# Altium PCB ServoBot.PcbDoc
Units mm, origin at the board's own origin, x right, y up, seen from the top; angles counter-clockwise.
Board outline 80.8 x 30 mm, 2 copper layers (Top Signal Layer, Bottom Signal Layer), stack 1.571 mm thick; 31 components, 24 nets, 110 pads, 26 vias.
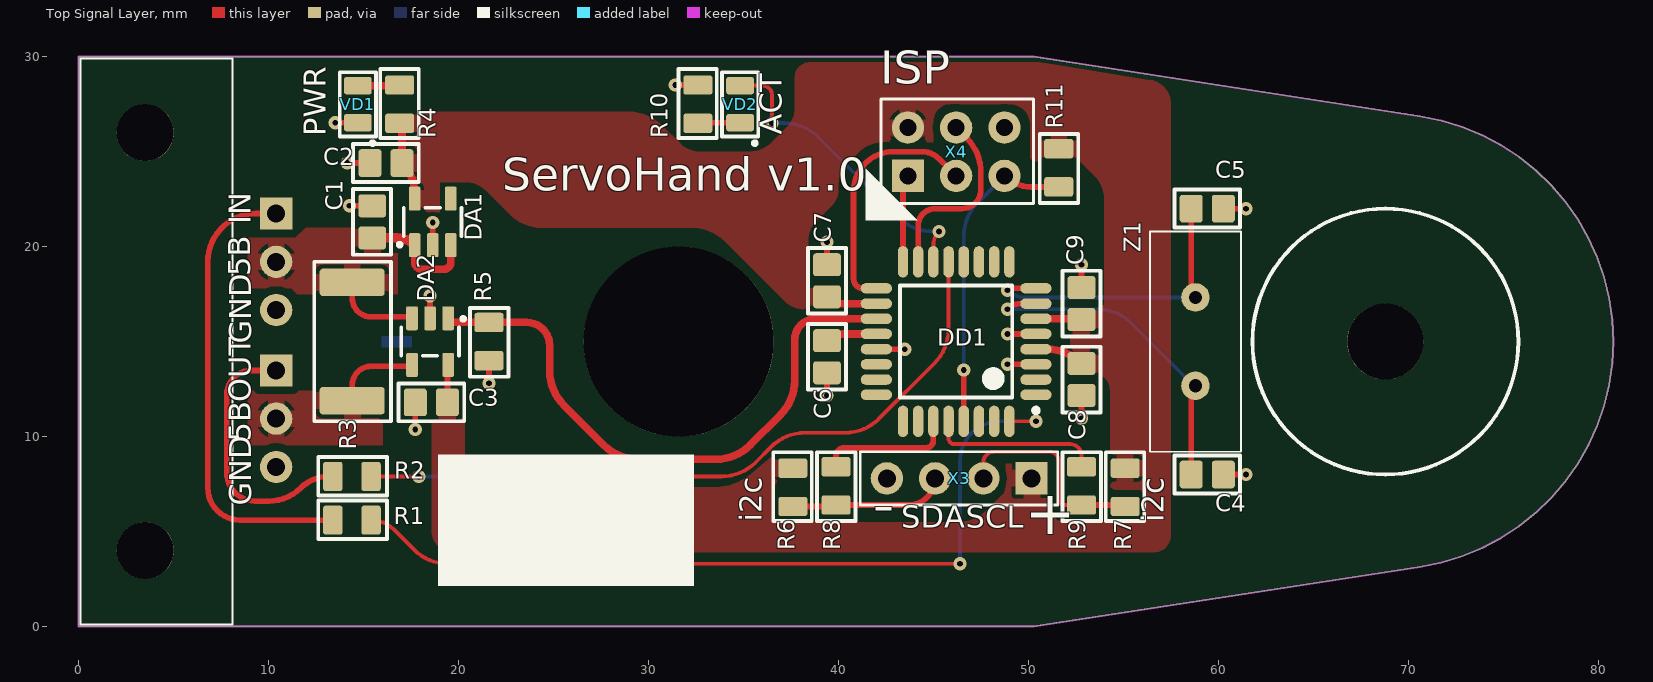
[diagram p0: Top Signal Layer view]
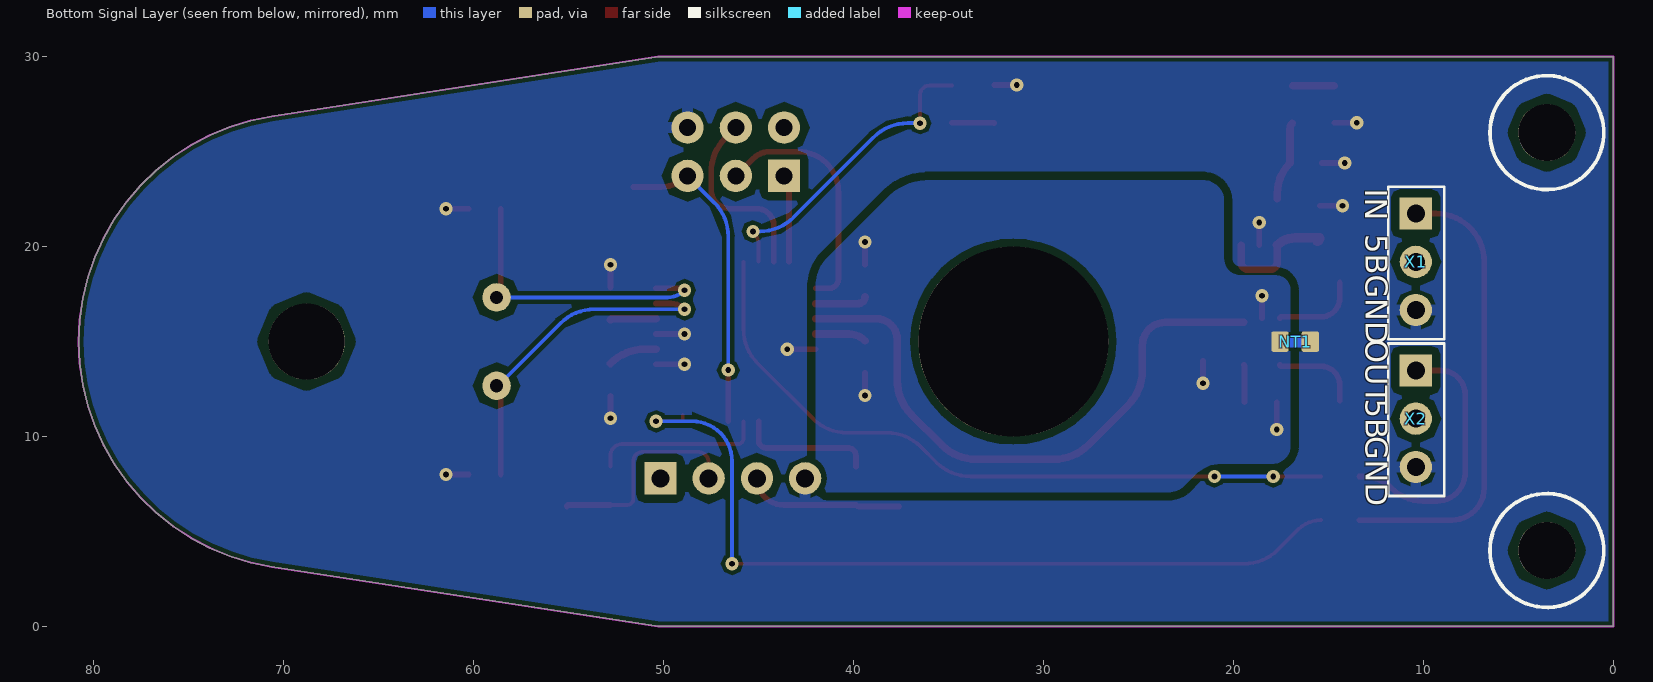
[diagram p1: Bottom Signal Layer view, seen from below]

## Layer stack, top to bottom
Top Solder: solder mask 0.0102, Solder Resist, Dk 3.5
Top Signal Layer: signal copper 0.0356
Dielectric 1: core 1.5, FR-4, Dk 4.2
Bottom Signal Layer: signal copper 0.0356
Bottom Solder: solder mask 0.0102, Solder Resist, Dk 3.5

## Board outline
0,30 50.3,30 70.632,26.859 71.743,26.634 72.827,26.304 73.876,25.873 74.88,25.346 75.829,24.726 76.715,24.019 77.531,23.232 78.269,22.372 78.922,21.445 79.485,20.462 79.953,19.429 80.321,18.357 80.586,17.255 80.746,16.132 80.8,15 80.746,13.868 80.586,12.745 80.321,11.643 79.953,10.571 79.485,9.538 78.922,8.555 78.269,7.628 77.531,6.768 76.715,5.981 75.829,5.274 74.88,4.654 73.876,4.127 72.827,3.696 71.743,3.366 70.632,3.141 50.3,0 0,0

## Design rules (kind name [scope] priority, off if disabled: settings)
Clearance Clearance_FUSE [InNet('NetFU1_1') vs InNet('GND')] p1: gap=0.5
Clearance Clearance_ConductPower [InNet('NetC1_1') vs InNet('GND')] p2: gap=0.3 except(0.5: THPad-Poly)
Clearance Clearance_MOTOR1 [InNet('NetA1_4') vs InNet('GND')] p3: gap=0.2 except(0.5: THPad-Poly)
Clearance Clearance_MOTOR2 [InNet('NetA1_5') vs InNet('GND')] p4: gap=0.2 except(0.5: THPad-Poly)
Clearance Clearance_MOTOR3 [InNet('NetA1_16') vs InNet('GND')] p5: gap=0.2 except(0.5: THPad-Poly)
Clearance Clearance_MOTOR4 [InNet('NetA1_17') vs InNet('GND')] p6: gap=0.2 except(0.5: THPad-Poly)
Clearance Clearance_8.4 [InNet('8,4В') vs InNet('GND')] p7: gap=0.3
Clearance Clearance_GND [InNet('AGND') vs InNet('GND')] p8: gap=0.3 except(0.4: Fill-Fill Fill-Poly Fill-Region Poly-Poly Poly-Region Region-Region)
Clearance Clearance_tracks_inner [OnLayer('Power Layer') OR OnLayer('Ground Layer')] p9: gap=0.35 // Зазоры между проводниками на внутренних слоях
Clearance [All] p10: gap=0.2 except(0.4: THPad-Poly)
ComponentClearance [All] p1: gap=0.001 collisioncheckmode=3 verticalgap=0 showdistances=FALSE
Height [All] p1: minheight=0 maxheight=100 prefheight=12.7
HoleSize [All] p1: absolutevalues=TRUE maxlimit=10 minlimit=0.3 maxpercent=80.000 minpercent=20.000
MinimumSolderMaskSliver [All] p1: minsoldermaskwidth=0.1
PolygonConnect PolygonConnect_nettie [HasFootprint('Pofigistor0603')] p1: connectstyle=Direct reliefconductorwidth=0.254 reliefentries=4 polygonreliefangle="90 Angle" airgapwidth=0.254
PolygonConnect PolygonConnect_Via [IsVia] p2: connectstyle=Direct reliefconductorwidth=0.254 reliefentries=4 polygonreliefangle="90 Angle" airgapwidth=0.2
PolygonConnect PolygonConnect_servoPowe [InNet('NetU1_3')] p3: connectstyle=Relief reliefconductorwidth=0.6 reliefentries=4 polygonreliefangle="90 Angle" airgapwidth=0.2
PolygonConnect PolygonConnect_TransPerepol [HasFootprint('D2PAK') vs InNet('NetC1_1')] p4: connectstyle=Relief reliefconductorwidth=5 reliefentries=4 polygonreliefangle="90 Angle" airgapwidth=0.2
PolygonConnect PolygonConnect_FuseDPAK [HasFootprint('D2PAK') vs InNet('NetFU1_2')] p5: connectstyle=Relief reliefconductorwidth=1 reliefentries=4 polygonreliefangle="90 Angle" airgapwidth=0.2
PolygonConnect PolygonConnect_SGND [InNet('SGND')] p6: connectstyle=Relief reliefconductorwidth=0.6 reliefentries=4 polygonreliefangle="90 Angle" airgapwidth=0.2
PolygonConnect PolygonConnect_MOTOR1 [InNet('NetA1_16')] p7: connectstyle=Relief reliefconductorwidth=0.6 reliefentries=4 polygonreliefangle="90 Angle" airgapwidth=0.2
PolygonConnect PolygonConnect_MOTOR2 [InNet('NetA1_17')] p8: connectstyle=Relief reliefconductorwidth=0.6 reliefentries=4 polygonreliefangle="90 Angle" airgapwidth=0.2
PolygonConnect PolygonConnect_MOTOR3 [InNet('NetA1_5')] p9: connectstyle=Relief reliefconductorwidth=0.6 reliefentries=4 polygonreliefangle="90 Angle" airgapwidth=0.2
PolygonConnect PolygonConnect_MOTOR4 [InNet('NetA1_4')] p10: connectstyle=Relief reliefconductorwidth=0.6 reliefentries=4 polygonreliefangle="90 Angle" airgapwidth=0.2
PolygonConnect PolygonConnect_SHUNT+ [InNet('8,4В')] p11: connectstyle=Relief reliefconductorwidth=0.8 reliefentries=4 polygonreliefangle="90 Angle" airgapwidth=0.2
PolygonConnect PolygonConnect_SHUNT- [InNet('NetC1_1')] p12: connectstyle=Relief reliefconductorwidth=0.6 reliefentries=4 polygonreliefangle="90 Angle" airgapwidth=0.2
PolygonConnect PolygonConnect_PWR [InNet('NetC1_2')] p13: connectstyle=Relief reliefconductorwidth=0.9 reliefentries=4 polygonreliefangle="90 Angle" airgapwidth=0.2
PolygonConnect PolygonConnect_PWR_OUT [InNet('NetDA2_4')] p14: connectstyle=Relief reliefconductorwidth=0.9 reliefentries=4 polygonreliefangle="90 Angle" airgapwidth=0.2
PolygonConnect PolygonConnect_5B [InNet('5B')] p15: connectstyle=Relief reliefconductorwidth=0.9 reliefentries=4 polygonreliefangle="90 Angle" airgapwidth=0.2
PolygonConnect PolygonConnect_SERVO [InNet('NetX3_1')] p16: connectstyle=Relief reliefconductorwidth=0.6 reliefentries=4 polygonreliefangle="90 Angle" airgapwidth=0.2
PolygonConnect PolygonConnect_GND [InNet('GND')] p17: connectstyle=Relief reliefconductorwidth=0.6 reliefentries=4 polygonreliefangle="90 Angle" airgapwidth=0.2
PolygonConnect [All] p18: connectstyle=Relief reliefconductorwidth=0.6 reliefentries=4 polygonreliefangle="90 Angle" airgapwidth=0.2
RoutingVias [All] p1: holewidth=0.711 width=1.27 viastyle="Through Hole" minholewidth=0.711 minwidth=1.27 maxholewidth=0.711 maxwidth=1.27
SilkToSilkClearance [All] p1: silktosilkclearance=0
SilkToSolderMaskClearance [IsPad] p1: minsilkscreentomaskgap=0 clearancetoexposedcopper=TRUE
SolderMaskExpansion [All] p1: expansion=0.05
Width [All] p1: maxlimit=4 minlimit=0.2 preferedwidth=0.2
Width 3,3В [InNet('3,3В')] p2: maxlimit=2 minlimit=0.2 preferedwidth=1
Width 24В [InNet('24В')] p3: maxlimit=4 minlimit=0.2 preferedwidth=4
Width 5В [InNet('5В')] p4: maxlimit=3 minlimit=0.2 preferedwidth=3
24 further rules are at their usual default settings.

## Components (designator, comment, footprint, x,y, rotation, side; value= is the part's Value field where it differs from the comment)
C1 "1мк" C0805 15.45,21.3 r270 top
C2 "4,7мк" C0805 16.18,24.4 r0 top
C3 "Capacitor" C0805 18.57,11.8 r0 top
C4 "22" C0805 59.42,8 r180 top
C5 "22" C0805 59.42,22 r180 top
C6 "Capacitor" C0805 39.4,14.2 r270 top
C7 "Capacitor" C0805 39.4,18.2 r90 top
C8 "Capacitor" C0805 52.8,13 r270 top
C9 "Capacitor" C0805 52.8,17 r90 top
DA1 "TPS763x" SOT23-5 18.64,21.3 r90 top
DA2 "INA1x9" SOT23-5 18.5,15 r270 top
DD1 "ATmega328P-AU" TQFP-32 46.2,15 r180 top
NT1 "Pofigistor" Pofigistor0603 16.75,15 r0 bottom net-tie
R1 "Resistor_0,125Вт" R0805 14.387,5.6 r0 top
R2 "Resistor_0,125Вт" R0805 14.387,7.9 r0 top
R3 "Resistor_1Вт" R2512 14.4,15 r270 top
R4 "Resistor_0,125Вт" R0805 16.9,27.5 r90 top
R5 "Resistor_0,125Вт" R0805 21.6,15 r270 top
R6 "Resistor_0,125Вт" R0805 37.6,7.325 r90 top
R7 "Resistor_0,125Вт" R0805 55.1,7.325 r90 top
R8 "Resistor_0,125Вт" R0805 39.875,7.4 r270 top
R9 "Resistor_0,125Вт" R0805 52.8,7.4 r270 top
R10 "Resistor_0,125Вт" R0805 32.6,27.5 r90 top
R11 "Resistor_0,125Вт" R0805 51.6,24.15 r270 top
VD1 "LED" L_0805 14.7,27.5 r90 top
VD2 "LED" L_0805 34.825,27.5 r90 top
X1 "Header_3_sct" PLS-3R 10.4,19.2 r180 bottom
X2 "Header_3_sct" PLS-3R 10.4,10.94 r180 bottom
X3 "Header_4_sct" PLS-4R 46.3,7.8 r270 top
X4 "ISP MKII" PLS2-6 46.3,25 r90 top
Z1 "Crystal" HC-49S 58.8,15 r270 top

## Footprints (in the part's own frame and the unit in brackets; to place one, negate y for a bottom-side part, rotate by r counter-clockwise, add the part's x,y. Pads: shape width x height; smd on the part's side, far side on the other; paste and mask are expansions set on the pad)
C0805 [mm]
  rrect25% 1.21x1.46 smd paste-5: 1(-0.845,0) 2(0.845,0)
  silkscreen extent -1.73,-1 1.73,1, body extent -1,-0.62 1,0.63, height 0.78
HC-49S [mm] "Кварцевый резонатор"
  round 1.5 hole 0.7: 1(-2.325,0) 2(2.325,0)
  silkscreen extent -5.8,-2.4 5.8,2.4, body extent -5.67,-2.32 5.68,2.33, height 3.6
L_0805 [mm] "SMD LED LAMP"
  rrect25% 0.91x1.46 smd: 1(-0.975,0) 2(0.975,0)
  silkscreen extent -2.15,-0.95 1.68,0.95, body extent -1.01,-0.62 1.01,0.63, height 1.1
PLS2-6 [mm] "Разъем для программатора ISP"
  rect 1.7x1.7 hole 0.9: 1(-1.275,2.64)
  round 1.7 hole 0.9: 2(1.265,2.64) 3(-1.275,0.1) 4(1.265,0.1) 5(-1.275,-2.44) 6(1.265,-2.44)
  silkscreen extent -2.73,-3.98 2.78,4.05, body extent -2.54,-3.81 2.54,3.81, height 8.54
PLS-3R [mm] "Разъем для программатора ISP"
  rect 1.7x1.7 hole 0.95: 1(0,2.54)
  round 1.7 hole 0.95: 2(0,0) 3(0,-2.54)
  silkscreen extent -1.45,-4.07 1.5,3.95, body extent -1.26,-3.82 7.36,3.8, height 5.45
PLS-4R [mm]
  rect 1.7x1.7 hole 0.95: 1(0,3.87)
  round 1.7 hole 0.95: 2(0,1.33) 3(0,-1.21)
  round 1.7 hole 0.95 mask+0.102: 4(0,-3.75)
  silkscreen extent -1.4,-5.15 1.4,5.25, body extent -1.27,-5.02 7.35,5.14, height 5.45
Pofigistor0603 [mm]
  rrect25% 0.92x1.08 smd paste+0: 1(-0.8,0)
  rrect25% 0.92x1.08 smd: 2(0.8,0)
  Top Signal Layer region: -0.8,0.3 0.8,0.3 0.8,-0.3 -0.8,-0.3
R0805 [mm] "Chip Resistor, 2-Leads, Body 2,10x1,30mm, IPC Medium Density"
  rrect25% 1.02x1.53 smd paste-5: 1(-1.007,0) 2(1.007,0)
  silkscreen extent -1.78,-1 1.85,1.02, body extent -1.1,-0.7 1.1,0.7, height 0.55
R2512 [mm]
  rrect25% 1.45x3.43 smd: 1(-3.115,0) 2(3.115,0)
  silkscreen extent -4.2,-2 4.2,2.05, body extent -3.35,-1.6 3.35,1.6, height 0.55
SOT23-5 [mm]
  rrect25% 1.26x0.61 smd: 1(-1.225,0.95) 2(-1.225,0) 3(-1.225,-0.95) 4(1.225,-0.95) 5(1.225,0.95)
  silkscreen extent -1.3,-1.52 0.75,1.84, body extent -1.6,-1.56 1.6,1.55, height 1.45
TQFP-32 [mm] "Thin QFP, 32-Leads, Body 7x7mm, Pitch 0.8mm, IPC Medium Density"
  oval 1.65x0.55 smd: 1(-4.2,2.8) 2(-4.2,2) 3(-4.2,1.2) 4(-4.2,0.4) 5(-4.2,-0.4) 6(-4.2,-1.2) 7(-4.2,-2) 8(-4.2,-2.8) 17(4.2,-2.8) 18(4.2,-2) 19(4.2,-1.2) 20(4.2,-0.4) 21(4.2,0.4) 22(4.2,1.2) 23(4.2,2) 24(4.2,2.8)
  oval 0.55x1.65 smd: 9(-2.8,-4.2) 10(-2,-4.2) 11(-1.2,-4.2) 12(-0.4,-4.2) 13(0.4,-4.2) 14(1.2,-4.2) 15(2,-4.2) 16(2.8,-4.2) 25(2.8,4.2) 26(2,4.2) 27(1.2,4.2) 28(0.4,4.2) 29(-0.4,4.2) 30(-1.2,4.2) 31(-2,4.2) 32(-2.8,4.2)
  silkscreen extent -4.33,-2.95 2.95,3.75, body extent -4.6,-4.6 4.6,4.6, height 1.2

## Part data
C1: library part cap151, "Конденсатор"
C2 C3: library part cap153, "Конденсатор"
C4 C5: library part cap223, "Конденсатор"
C6 C7 C8 C9: library part cap162, "Конденсатор"
DA1: library part pwr50, "Low-Dropout Regulator"
DA2: library part amp3, "Измерительный датчик тока"
DD1: library part microcont1, "Микроконтроллер 8-Бит, picoPower, AVR, 20МГц, 32КБ Flash"
NT1: library part res970
R1 R2 R8 R9: library part res49, "Резистор"
R3: library part res772, "Резистор"
R4: library part res66, "Резистор"
R5: library part res106, "Резистор"
R6 R7 R10 R11: library part res97, "Резистор"
VD1 VD2: library part diode5, "Светодиод"
X1 X2: library part connect126, "Разъем - 3 конт. розетка"
X3: library part connect127, "Разъем - 4 конт. розетка"
X4: library part connect40, "Разъем - 6 конт. вилка"
Z1: library part crystal7, "Кварцевый резонатор"

## Free pads (board coordinates)
  round 3 hole 3 unplated: ""(3.5,4) ""(3.5,26)
  round 10 hole 10 unplated: ""(31.59,15)
  round 4 hole 4 unplated: ""(68.8,15)

## Via types
v1: diameter 0.7, hole 0.3, Top Signal Layer to Bottom Signal Layer, tented both sides, 26 vias

## Nets (pads, with @x,y where several pads share a name; then routed paths per layer and width w, separated by ;. In a path a pad name is that pad's centre, name@x,y a point inside that pad or via, vN(x,y) a via of type N, cw(c..) or ccw(c..) an arc to the next point about the centre after c; other vN are vias at no path point)
5B: C2.2 C3.2 C7.1 C8.1 C9.1 DA1.5 DA2.5 DD1.4 DD1.6 DD1.18 R4.1 R6.2 R7.2 R11.1 X3.1 X4.2 | length 14
  Top Signal Layer w0.3: C3.2 19.415,13.74 DA2.5
  Top Signal Layer w0.4: R4.1 cw(c16.598,26.191) 17.025,26.191 C2.2 cw(c15.42,22.795) 17.69,22.795 DA1.5 ; C7.1 ccw(c39.755,17.355) 39.755,17 DD1.18 ; DD1.4 50.993,14.6 cw(c50.993,12.06) 52.789,13.856 C8.1 ; DD1.6 52.691,16.2 cw(c52.691,16.046) C9.1
ACT_LED: DD1.14 VD2.2 | length 16.1
  Top Signal Layer w0.2: VD2.2 36.018,28.475 cw(c36.018,27.993) 36.5,27.993 v1(36.5,26.5) ; DD1.14 45,20.076 cw(c46.024,20.076) v1(45.3,20.8)
  Bottom Signal Layer w0.2: v1(36.5,26.5) 37.148,26.5 cw(c37.148,23.96) 38.944,25.756 43.156,21.544 ccw(c44.952,23.34) 44.952,20.8 v1(45.3,20.8)
AGND: C3.1 C6.2 C7.2 DA2.2 NT1.2 R5.2 | length 6.2
  Top Signal Layer w0.3: v1(17.725,10.375) C3.1 ; DA2.2 v1(18.5,17.418) ; v1(21.6,12.8) R5.2 ; v1(39.4,12.162) C6.2 ; C7.2 v1(39.4,20.238)
CURRENT: DA2.1 DD1.19 R5.1 | length 31.8
  Top Signal Layer w0.4: DA2.1@19.45,16.007 R5.1 23.593,16.007 cw(c23.593,14.8) 24.8,14.8 24.8,13.201 24.812,13.201 ccw(c27.34,13.452) 25.544,11.656 27.656,9.544 ccw(c29.452,11.34) 29.452,8.8 33.548,8.8 ccw(c33.548,11.34) 35.344,9.544 36.956,11.156 ccw(c35.16,12.952) 37.7,12.952 37.7,15.1 cw(c38.8,15.1) 38.8,16.2 DD1.19
GND: C1.1 C2.1 C4.1 C5.1 C8.2 C9.2 DA1.2 DD1.3 DD1.5 DD1.21 NT1.1 R10.2 VD1.1 X1.3 X2.3 X3.4 X4.6 | length 15.2
  Top Signal Layer w0.3: v1(13.507,26.525) VD1.1 ; v1(14.143,24.4) C2.1 ; v1(14.258,22.145) C1.1 ; DA1.2 v1(18.64,21.268) ; v1(31.408,28.507) R10.2 ; DD1.21 v1(43.5,14.6) ; v1(48.9,13.8) DD1.3 ; v1(48.9,15.4) DD1.5 ; v1(52.8,10.962) C8.2 ; C9.2 v1(52.8,19.038) ; C4.1 v1(61.457,8) ; C5.1 v1(61.457,22)
MISO: DD1.16 X4.1 | length 4.6
  Top Signal Layer w0.3: DD1.16 43.4,23.097 cw(c44.288,23.097) X4.1
MOSI: DD1.15 X4.4 | length 10
  Top Signal Layer w0.3: DD1.15 44.2,21.1 cw(c45.1,21.1) 45.1,22 46.5,22 ccw(c46.5,23) 47.5,23 47.5,23.913 ccw(c44.96,23.913) 46.756,25.709 X4.4
NetC1_2: C1.2 DA1.1 DA1.3 DA2.3 R3.1 X1.2 | length 11.3
  Top Signal Layer w0.3: R3.1 14.4,17.3 ccw(c15.4,17.3) 15.4,16.3 17.475,16.3 cw(c17.475,16.225) DA2.3
  Top Signal Layer w0.4: DA1.1 17.69,19.21 ccw(c18.1,19.21) 18.1,18.8 19.2,18.8 ccw(c19.2,19.2) 19.6,19.2 19.6,20.075 DA1.3
  Top Signal Layer w0.5: C1.2@15.625,20.28 cw(c15.625,20.455) C1.2 16.773,20.455 cw(c16.773,19.158) DA1.1
NetC4_2: C4.2 DD1.7 Z1.2 | length 17.8
  Top Signal Layer w0.3: v1(48.9,16.7) cw(c49.624,15.976) 49.624,17 DD1.7 ; C4.2 58.575,12.132 cw(c59.343,12.132) Z1.2
  Bottom Signal Layer w0.2: v1(48.9,16.7) 53.648,16.7 cw(c53.648,14.16) 55.444,15.956 Z1.2@58.672,12.728
  Bottom Signal Layer w0.3: Z1.2@58.672,12.728 ccw(c58.8,12.856) Z1.2
NetC5_2: C5.2 DD1.8 Z1.1 | length 16.3
  Top Signal Layer w0.3: v1(48.9,17.7) cw(c49.141,17.459) 49.141,17.8 DD1.8 ; C5.2 58.575,17.868 ccw(c59.343,17.868) Z1.1
  Bottom Signal Layer w0.2: v1(48.9,17.7) ccw(c49.805,18.605) 49.805,17.325 Z1.1
NetC6_1: C6.1 DD1.20 | length 2.7
  Top Signal Layer w0.4: C6.1 cw(c40.257,14.188) 40.257,15.4 DD1.20
NetDA2_4: DA2.4 R3.2 X2.2 | length 4.6
  Top Signal Layer w0.3: R3.2 14.4,12.7 cw(c15.4,12.7) 15.4,13.7 17.475,13.7 ccw(c17.475,13.775) DA2.4
NetDD1_27: DD1.27 R8.1 | length 7.2
  Top Signal Layer w0.3: R8.1 39.875,8.975 cw(c40.3,8.975) 40.3,9.4 44.6,9.4 ccw(c44.6,9.8) 45,9.8 DD1.27
NetDD1_28: DD1.28 R9.1 | length 9
  Top Signal Layer w0.2: DD1.28 45.8,9.9 ccw(c46.1,9.9) 46.1,9.6 52.2,9.6 cw(c52.2,9) 52.8,9 R9.1
NetR1_1: R1.1 X1.1 | length 24.5
  Top Signal Layer w0.3: X1.1 9.34,21.74 ccw(c9.34,19.2) 6.8,19.2 6.8,7.3 ccw(c8.5,7.3) 8.5,5.6 R1.1
NetR2_1: R2.1 X2.1 | length 14.2
  Top Signal Layer w0.3: X2.1 9.08,13.48 ccw(c9.08,12.2) 7.8,12.2 7.8,8.1 ccw(c9.3,8.1) 9.3,6.6 10.01,6.6 ccw(c10.01,8.99) 11.7,7.3 cw(c13.149,5.851) 13.149,7.9 R2.1
NetR4_2: R4.2 VD1.2 | length 2.2
  Top Signal Layer w0.3: R4.2@16.867,28.475 R4.2
  Top Signal Layer w0.4: VD1.2 R4.2@16.867,28.475
NetR10_1: R10.1 VD2.1 | length 2.2
  Top Signal Layer w0.3: R10.1 cw(c32.633,26.493) 32.633,26.525 VD2.1
RESET: DD1.29 R11.2 X4.5 | length 16.7
  Top Signal Layer w0.3: DD1.29 v1(46.6,13.5) ; X4.5 ccw(c50.146,25.131) 50.146,23.142 R11.2
  Bottom Signal Layer w0.2: v1(46.6,13.5) 46.6,20.533 cw(c49.14,20.533) 47.344,22.329 X4.5
SCK: DD1.17 X4.3 | length 13.2
  Top Signal Layer w0.3: DD1.17 41.3,17.8 cw(c41.3,18.3) 40.8,18.3 40.8,22.9 cw(c42.9,22.9) 42.334,24.922 cw(c42.9,22.9) 42.9,25 44.4,25 cw(c44.4,23.733) 45.296,24.629 X4.3
SCL: R7.1 R9.2 X3.2 | length 11.1
  Top Signal Layer w0.2: X3.2 47.63,8.63 cw(c48.2,8.63) 48.2,9.2 51.1,9.2 cw(c51.1,8.7) 51.6,8.7 51.6,6.7 ccw(c51.9,6.7) 51.9,6.4 52.8,6.4 R9.2
  Top Signal Layer w0.3: R9.2 55.025,6.393 cw(c55.025,6.318) R7.1
SDA: R6.1 R8.2 X3.3 | length 8.3
  Top Signal Layer w0.3: R6.1 39.694,6.318 ccw(c39.694,6.574) R8.2 43.682,6.392 ccw(c43.682,7.8) X3.3
SERVO_IN: DD1.32 R1.2 | length 44.1
  Top Signal Layer w0.2: R1.2 cw(c15.395,3.898) 16.599,5.101 17.656,4.044 ccw(c19.452,5.84) 19.452,3.3 v1(46.4,3.3) ; DD1.32@49,11.148 DD1.32 v1(50.4,10.8)
  Bottom Signal Layer w0.2: v1(46.4,3.3) 46.4,8.7 cw(c48.5,8.7) 48.5,10.8 v1(50.4,10.8)
SERVO_OUT: DD1.13 R2.2 | length 37.3
  Top Signal Layer w0.2: R2.2 v1(17.9,7.9) ; v1(21,7.9) 33.848,7.9 ccw(c33.848,10.44) 35.644,8.644 36.456,9.456 cw(c38.252,7.66) 38.252,10.2 40.348,10.2 ccw(c40.348,12.74) 42.144,10.944 45.056,13.856 ccw(c43.26,15.652) 45.8,15.652 DD1.13
  Bottom Signal Layer w0.2: v1(17.9,7.9) v1(21,7.9)
pads on no net: DA1.4 DD1.1 DD1.2 DD1.9 DD1.10 DD1.11 DD1.12 DD1.22 DD1.23 DD1.24 DD1.25 DD1.26 DD1.30 DD1.31

## Polygon pours and split planes (outlines as drawn)
NetC1_2 on Top Signal Layer "Top Signal Layer-No Net" (solid, remove dead copper, pour order 0): 8.9,17.8 11.2,17.8 11.5,17.5 16.8,17.5 16.8,19.65 16,19.65 16,21 11.945,21 11.406,20.462 8.9,20.462
NetDA2_4 on Top Signal Layer "Top Signal Layer-No Net" (solid, remove dead copper, pour order 10): 16,12.4 8.9,12.4 8.9,9.538 16,9.538
5B on Top Signal Layer "Top Signal Layer-No Net" (solid, remove dead copper, pour order 2): 16.8,23.1 16.8,21.8 19,21.8 19,23.4 20.317,23.4 cw(c20.318,21.756) 21.483,22.917 22.746,21.654 ccw(c24.324,23.231) 24.324,21 32.276,21 cw(c32.276,18.53) 34.024,20.276 37.188,17.112 ccw(c38.183,18.107) 38.183,16.7 38.4,16.7 39.376,16.7 40.1,16.7 40.1,18.1 38.4,18.1 38.4,20.317 cw(c39.807,20.317) 38.812,21.312 39.659,22.159 ccw(c38.836,22.982) 40,22.983 40,23.317 cw(c41.407,23.317) 40.412,24.312 41.074,24.974 cw(c42.343,23.705) 42.344,25.5 45,25.5 45,26.6 cw(c45.899,26.6) 45.9,27.5 49.023,27.5 cw(c49.024,26.424) 50.1,26.423 50.1,24.5 52.7,24.5 53.517,23.683 cw(c52.356,22.52) 54,22.517 54,17.4 54,16.9 52.2,16.9 52.2,13.2 53.9,13.2 54.059,13.041 cw(c53.478,12.46) 54.3,12.459 54.3,7.517 ccw(c54.617,7.517) 54.617,7.2 55.783,7.2 cw(c55.783,6.866) 56.117,6.866 56.117,5.817 cw(c55.8,5.817) 55.8,5.5 51.855,5.5 cw(c51.855,6.155) 51.2,6.155 51.2,8.555 48.8,8.555 48.8,7.341 cw(c48.219,7.341) 48.629,6.929 47.818,6.118 cw(c46.326,7.61) 46.326,5.5 36.9,5.5 cw(c36.9,5.917) 36.483,5.917 36.483,7.155 cw(c36.845,7.155) 36.845,7.517 38.503,7.517 38.503,9.175 36.753,9.175 35.416,8.045 cw(c33.496,10.315) 33.496,7.341 20.759,7.341 cw(c20.759,7.783) 20.317,7.783 20.317,12.459 18.6,12.459 18.6,5 ccw(c19.7,5) 19.7,3.9 56.596,3.9 ccw(c56.596,4.804) 57.5,4.804 57.5,13.2 57.5,24.5 57.5,27.514 ccw(c56.228,27.515) 56.428,28.771 50.6,29.7 44.8,29.7 40,29.7 38.5,29.7 ccw(c38.499,28.901) 37.7,28.9 37.7,27.283 cw(c36.299,27.28) 37.288,26.288 36.483,25.483 cw(c35.319,26.645) 35.317,25 32.683,25 cw(c32.682,26.406) 31.688,25.412 30.724,26.376 ccw(c28.979,24.634) 28.976,27.1 16.8,27.1
AGND on Bottom Signal Layer "Top Signal Layer-No Net" (solid, remove dead copper, pour order 4): 20.5,22.4 20.5,19.366 cw(c19.634,19.366) 19.634,18.5 17.8,18.5 ccw(c17.8,17.7) 17,17.7 17,9.5 ccw(c17.945,9.5) 17.945,8.555 20.685,8.555 cw(c20.685,6.72) 21.983,8.017 22.588,7.412 ccw(c23.415,8.24) 23.415,7.07 42,7.07 42,17.876 ccw(c39.769,17.876) 41.346,19.454 38.195,22.605 ccw(c36.035,20.445) 36.034,23.5 21.6,23.5 ccw(c21.6,22.4)
GND on Bottom Signal Layer "Top Signal Layer-No Net" (solid, remove dead copper, pour order 8): 0,30 0,0 50.3,0 69.8,3.012 80.321,3.012 80.8,3.012 80.8,26.304 74.227,26.304 67,27.42 63.7,27.93 57.288,28.921 50.3,30

## Keep-outs
Keep-Out Layer:
  the board outline again, w0.1

## Silkscreen, mask and mechanical layers (free items; w line width, h text height)
Top Overlay:
  circle w0.2: c68.8,15 r7
  rectangle: 18.925,2.125 32.4,9.05
  region: 41.45,24.1 41.45,21.4 44.15,21.4
  lines w0.1: 0.1,0.1 0.1,29.9 8.1,29.9 8.1,0.1 0.1,0.1
  text "ISP" at 42.2,28 h3
  text "ACT" at 37.4,25.9 h2 r90
  text "PWR" at 13.4,25.8 h2 r90
  text "ServoHand v1.0" at 22.3,22.35 h3
  text "IN" at 9.464,21.185 h2 r90
  text "5B" at 9.425,18.45 h2 r90
  text "GND" at 9.475,14.875 h2 r90
  text "OUT" at 9.45,11.8 h2 r90
  text "5B" at 9.45,9.725 h2 r90
  text "GND" at 9.475,6.35 h2 r90
  text "i2c" at 36.35,5.525 h2 r90
  text "i2c" at 57.525,5.475 h2 r90
  text "SDA" at 43.3,4.8 h2
  text "SCL" at 46.7,4.8 h2
  text "-" at 41.8,4.6 h4
  text "+" at 49.8,4.1 h4
Bottom Overlay:
  circle w0.2: c3.5,26 r3
  circle w0.2: c3.5,4 r3
  text "IN" at 13.445,23.035 h2 r90
  text "5B" at 13.425,20.66 h2 r90
  text "GND" at 13.425,18.51 h2 r90
  text "OUT" at 13.425,15.125 h2 r90
  text "5B" at 13.425,12 h2 r90
  text "GND" at 13.425,10.025 h2 r90